# Altium PCB SHIELD_W5500.PcbDoc
Units mil, origin at the board's own origin, x right, y up, seen from the top; angles counter-clockwise.
Board outline 2700 x 2100 mil, 2 copper layers (Top Layer, Bottom Layer); 88 components, 60 nets, 292 pads, 76 vias.
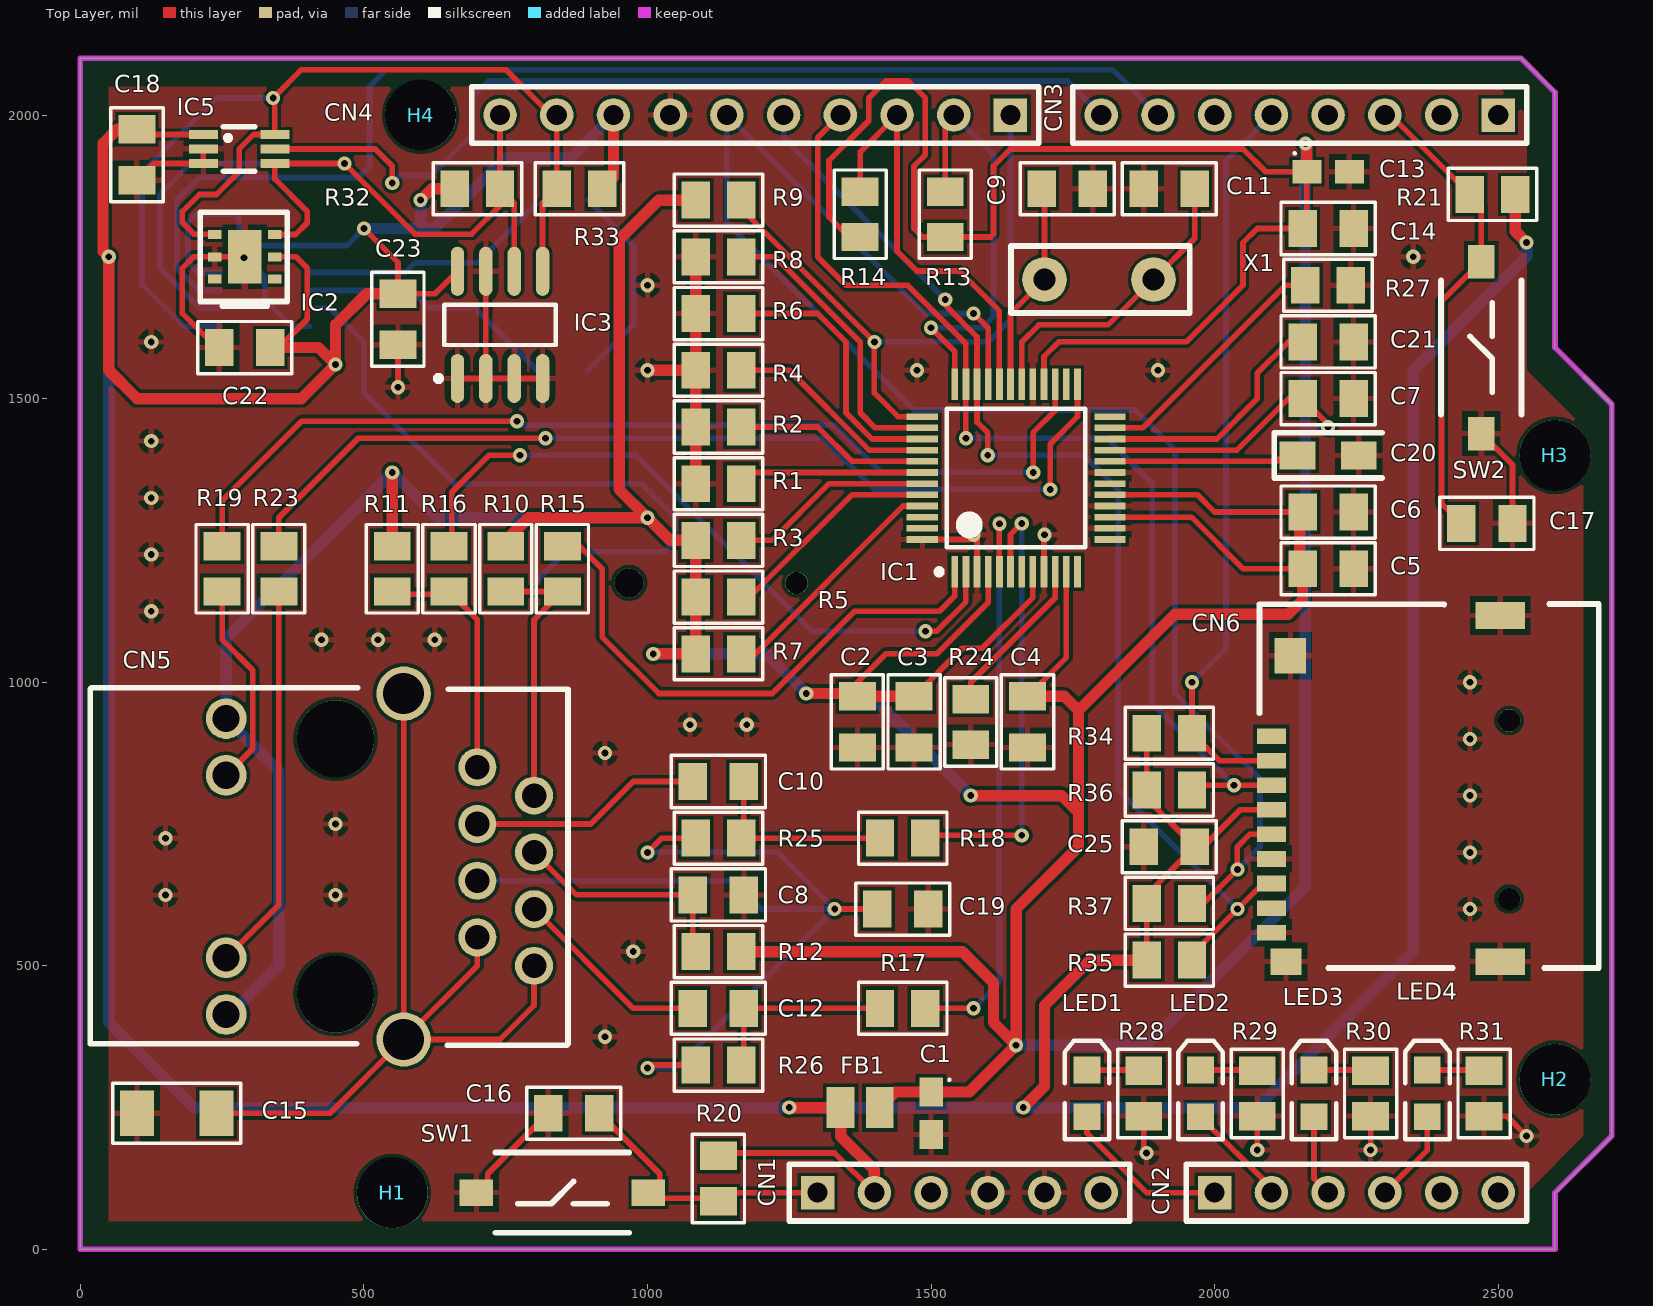
[diagram p0: Top Layer view]
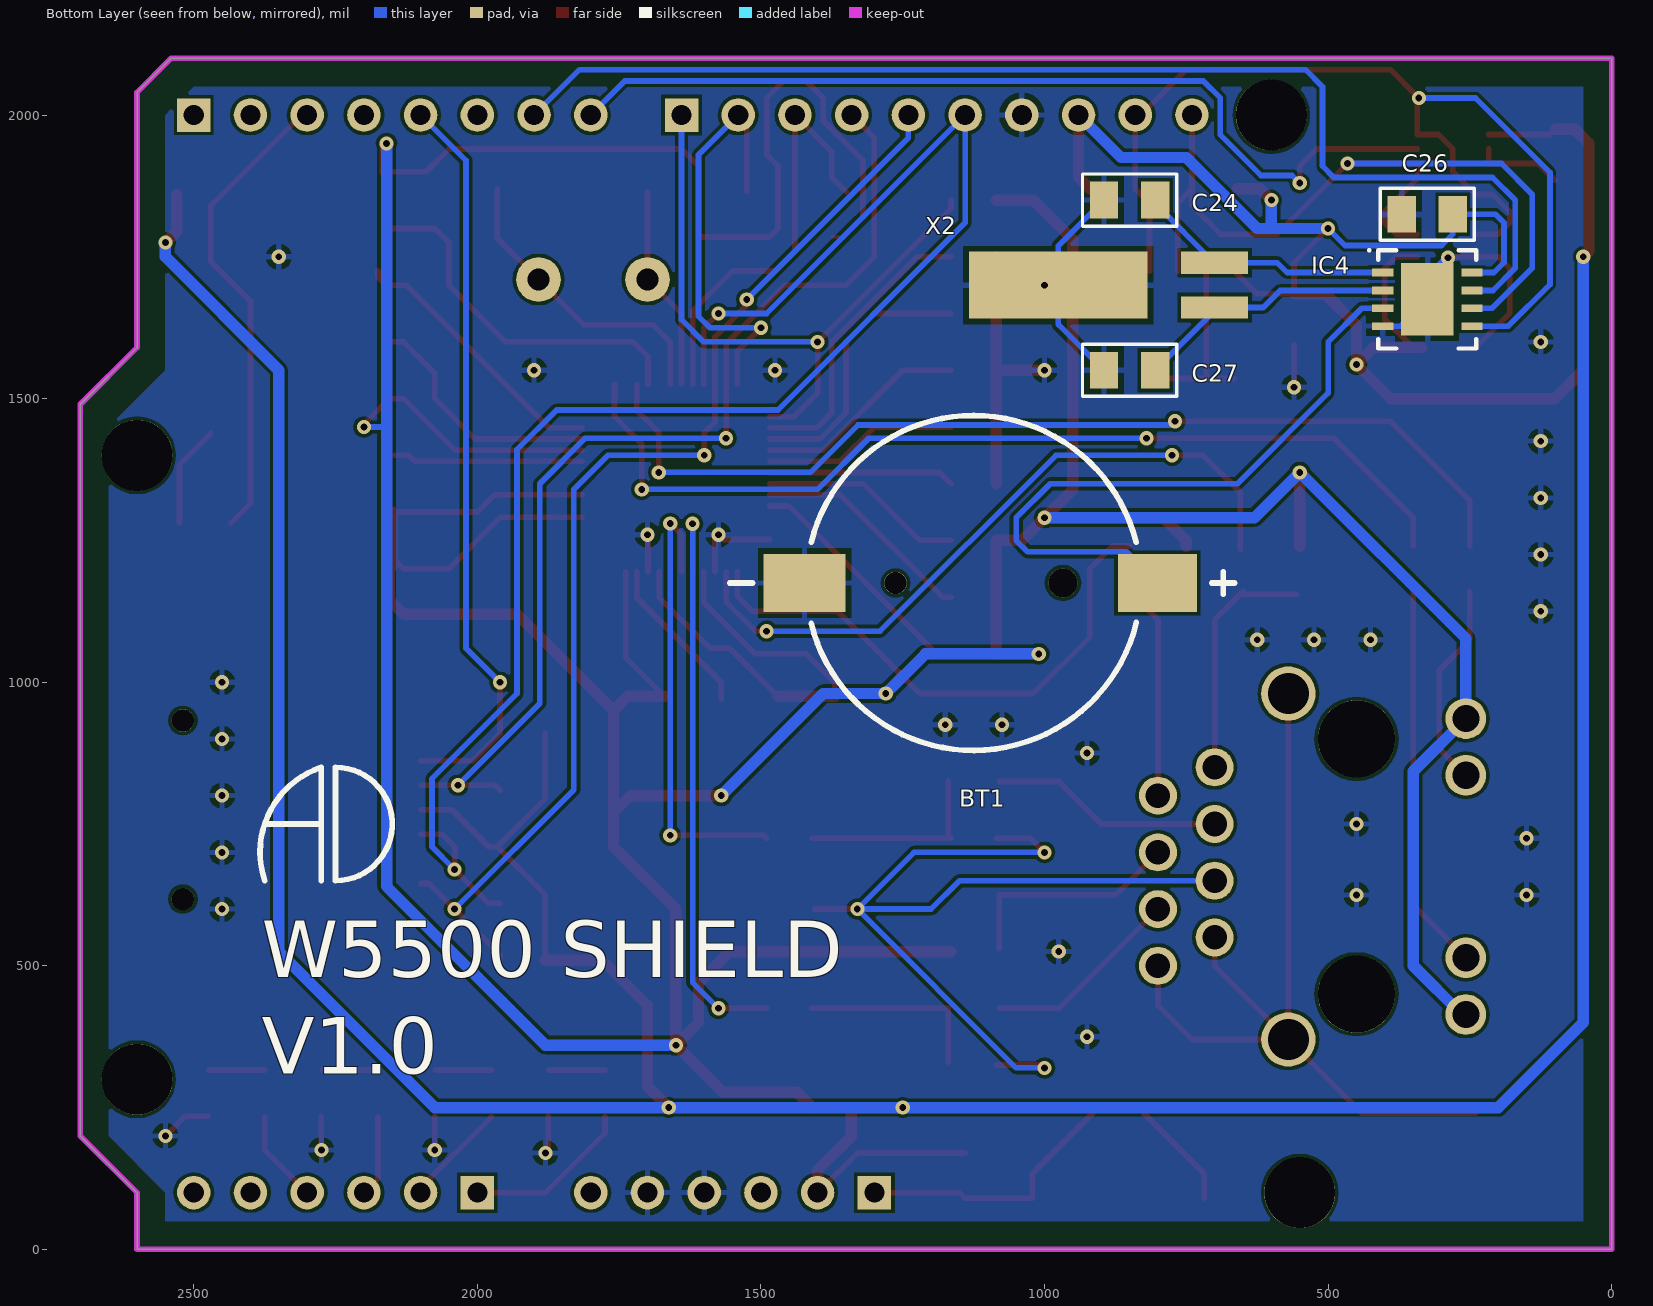
[diagram p1: Bottom Layer view, seen from below]

## Layer stack, top to bottom
Top Solder: solder mask 0.4, Solder Resist, Dk 3.5
Top Layer: signal copper 1.4
Dielectric 1: dielectric 12.6, FR-4, Dk 4.8
Bottom Layer: signal copper 1.4
Bottom Solder: solder mask 0.4, Solder Resist, Dk 3.5

## Board outline
0,0 0,2100 2540,2100 2600,2040 2600,1590 2700,1490 2700,200 2600,100 2600,0

## Design rules (kind name [scope] priority, off if disabled: settings)
AssemblyTestPointUsage SilkToBoardRegionClearance_1 [All] p2:
AssemblyTestPointUsage SilkToBoardRegionClearance_2 [All] p3:
Clearance [All] p1: gap=6
HoleSize [All] p1: absolutevalues=TRUE maxlimit=250 minlimit=11.81 maxpercent=80.000 minpercent=20.000
MatchedLengths DiffPair_DIFF100MatchedLengths [InDifferentialPairClass('DIFF100')] p1: tolerance=6 checknetsindiffpair=TRUE checkdiffpairvsdiffpair=FALSE checkxsignals=FALSE checkothers=FALSE
MinimumSolderMaskSliver [All] p1: minsoldermaskwidth=3.94
MinimumSolderMaskSliver SilkscreenOverComponentPads_2 [All] p2: minsoldermaskwidth=10
MinimumSolderMaskSliver SilkToSolderMaskClearance_1 [IsPad] p3: minsoldermaskwidth=10
MinimumSolderMaskSliver SilkscreenOverComponentPads_1 [All] p4: minsoldermaskwidth=10
MinimumSolderMaskSliver SilkToSolderMaskClearance [IsPad] p5: minsoldermaskwidth=10
MinimumSolderMaskSliver SilkscreenOverComponentPads [All] p6: minsoldermaskwidth=10
PolygonConnect [All] p1: connectstyle=Relief reliefconductorwidth=10 reliefentries=4 polygonreliefangle="90 Angle" airgapwidth=10
RoutingVias [All] p1: holewidth=12 width=25 viastyle="Through Hole" minholewidth=12 minwidth=25 maxholewidth=28 maxwidth=50
SilkToSolderMaskClearance SilkToSolderMaskClearance_2 [IsPad] p1: minsilkscreentomaskgap=10 clearancetoexposedcopper=TRUE
SolderMaskExpansion [All] p1: expansion=4
Width [All] p1: maxlimit=20 minlimit=6 preferedwidth=10 minimp=50.000000 maximp=50.000000 favimp=50.000000
27 further rules are at their usual default settings.

## Components (designator, comment, footprint, x,y, rotation, side; value= is the part's Value field where it differs from the comment)
BT1 "BATTERY" MPD_BC501SM 1125,1175 r180 bottom
C1 "CAP_P" CAPMP2013X12N_EIA-0805_CASE-R 1500,240 r270 top
C2 "CAP_NP" CAPC2012X100N_EIA0805 1370,930 r90 top
C3 "CAP_NP" CAPC2012X100N_EIA0805 1470,930 r90 top
C4 "CAP_NP" CAPC2012X100N_EIA0805 1670,930 r90 top
C5 "CAP_NP" CAPC2012X100N_EIA0805 2200,1200 r180 top
C6 "CAP_NP" CAPC2012X100N_EIA0805 2200,1300 r180 top
C7 "CAP_NP" CAPC2012X100N_EIA0805 2200,1500 r180 top
C8 "CAP_NP" CAPC2012X100N_EIA0805 1125,625 r0 top
C9 "CAP_NP" CAPC2012X100N_EIA0805 1740,1870 r0 top
C10 "CAP_NP" CAPC2012X100N_EIA0805 1125,825 r0 top
C11 "CAP_NP" CAPC2012X100N_EIA0805 1920,1870 r180 top
C12 "CAP_NP" CAPC2012X100N_EIA0805 1125,425 r0 top
C13 "CAP_P" CAPMP2013X12N_EIA-0805_CASE-R 2200,1900 r0 top
C14 "CAP_NP" CAPC2012X100N_EIA0805 2200,1800 r180 top
C15 "CAP_NP" CAPC3216X125N_EIA1206 170,240 r180 top
C16 "CAP_NP" CAPC2012X100N_EIA0805 870,240 r0 top
C17 "CAP_NP" CAPC2012X100N_EIA0805 2480,1280 r180 top
C18 "CAP_NP" CAPC2012X100N_EIA0805 100,1930 r270 top
C19 "CAP_NP" CAPC2012X100N_EIA0805 1450,600 r180 top
C20 "CAP_P" CAPMP3216X16N_EIA-1206_CASE-A 2200,1400 r0 top
C21 "CAP_NP" CAPC2012X100N_EIA0805 2200,1600 r180 top
C22 "CAP_NP" CAPC2012X100N_EIA0805 290,1590 r0 top
C23 "CAP_NP" CAPC2012X100N_EIA0805 560,1640 r90 top
C24 "CAP_NP" CAPC2012X100N_EIA0805 850,1850 r180 bottom
C25 "CAP_NP" CAPC2012X100N_EIA0805 1920,710 r0 top
C26 "CAP_NP" CAPC2012X100N_EIA0805 325,1825 r180 bottom
C27 "CAP_NP" CAPC2012X100N_EIA0805 850,1550 r180 bottom
CN1 "HDR_1X6" HDRFV6W70P254_1X6_1524X254X1118P 1300,100 r0 top locked
CN2 "HDR_1X6" HDRFV6W70P254_1X6_1524X254X1118P 2000,100 r0 top locked (schematic designator CN3)
CN3 "HDR_1X8" HDRFV8W70P254_1X8_2032X254X1118P 2500,2000 r180 top locked (schematic designator CN4)
CN4 "HDR_1X10" HDRFV10W70P254_1X10_2540X254X1118P 1640,2000 r180 top locked (schematic designator CN2)
CN5 "HR911105A" HANRUN_HR911105A 450,675 r90 top locked
CN6 "MICRO-SD" MICRO-SD-SELF-EJECT 2100,775 r180 top locked
FB1 "BEAD" FILC2012X100N_EIA0805 1375,250 r180 top
H1 "HOLES" HOLE_125MIL 550,100 r0 top locked
H2 "HOLES" HOLE_125MIL 2600,300 r0 top locked
H3 "HOLES" HOLE_125MIL 2600,1400 r0 top locked
H4 "HOLES" HOLE_125MIL 600,2000 r0 top locked
IC1 "W5500" QFP50P900X900X160-48N 1650,1360 r90 top
IC2 "SHT21" SHT21 290,1750 r180 top
IC3 "AT24C128" SOIC127P600X175-8N 740,1630 r90 top
IC4 "PCF8523TK/1,118" SON80P400X100_HS-9N_[NXP]SOT909-1 325,1675 r180 bottom
IC5 "TSL256x" DFN-6 280,1940 r0 top
LED1 "LED" LEDC2012X70N_EIA0805_RED 1775,275 r270 top
LED2 "LED" LEDC2012X70N_EIA0805_RED 1975,275 r270 top
LED3 "LED" LEDC2012X70N_EIA0805_RED 2175,275 r270 top
LED4 "LED" LEDC2012X70N_EIA0805_RED 2375,275 r270 top
R1 "RES" RESC2013X65N_EIA0805 1125,1350 r180 top
R2 "RES" RESC2013X65N_EIA0805 1125,1450 r180 top
R3 "RES" RESC2013X65N_EIA0805 1125,1250 r180 top
R4 "RES" RESC2013X65N_EIA0805 1125,1550 r180 top
R5 "RES" RESC2013X65N_EIA0805 1125,1150 r180 top
R6 "RES" RESC2013X65N_EIA0805 1125,1650 r180 top
R7 "RES" RESC2013X65N_EIA0805 1125,1050 r180 top
R8 "RES" RESC2013X65N_EIA0805 1125,1750 r180 top
R9 "RES" RESC2013X65N_EIA0805 1125,1850 r180 top
R10 "RES" RESC2013X65N_EIA0805 750,1200 r270 top
R11 "RES" RESC2013X65N_EIA0805 550,1200 r270 top
R12 "RES" RESC2013X65N_EIA0805 1125,525 r180 top
R13 "RES" RESC2013X65N_EIA0805 1525,1825 r90 top
R14 "RES" RESC2013X65N_EIA0805 1375,1825 r90 top
R15 "RES" RESC2013X65N_EIA0805 850,1200 r270 top
R16 "RES" RESC2013X65N_EIA0805 650,1200 r270 top
R17 "RES" RESC2013X65N_EIA0805 1450,425 r180 top
R18 "RES" RESC2013X65N_EIA0805 1450,725 r180 top
R19 "RES" RESC2013X65N_EIA0805 250,1200 r270 top
R20 "RES" RESC2013X65N_EIA0805 1125,125 r270 top
R21 "RES" RESC2013X65N_EIA0805 2490,1860 r180 top
R23 "RES" RESC2013X65N_EIA0805 350,1200 r270 top
R24 "RES" RESC2013X65N_EIA0805 1570,930 r270 top
R25 "RES" RESC2013X65N_EIA0805 1125,725 r180 top
R26 "RES" RESC2013X65N_EIA0805 1125,325 r180 top
R27 "RES" RESC2013X65N_EIA0805 2200,1700 r0 top
R28 "RES" RESC2013X65N_EIA0805 1875,275 r270 top
R29 "RES" RESC2013X65N_EIA0805 2075,275 r90 top
R30 "RES" RESC2013X65N_EIA0805 2275,275 r90 top
R31 "RES" RESC2013X65N_EIA0805 2475,275 r90 top
R32 "RES" RESC2013X65N_EIA0805 700,1870 r0 top
R33 "RES" RESC2013X65N_EIA0805 880,1870 r180 top
R34 "RES" RESC2013X65N_EIA0805 1920,910 r0 top
R35 "RES" RESC2013X65N_EIA0805 1920,510 r0 top
R36 "RES" RESC2013X65N_EIA0805 1920,810 r0 top
R37 "RES" RESC2013X65N_EIA0805 1920,610 r0 top
SW1 "SWITCH_TACTILE_2PIN" C&K_RS-282G05A3-SM_RT 850,100 r0 top
SW2 "SWITCH_TACTILE_2PIN" C&K_RS-282G05A3-SM_RT 2470,1590 r90 top
X1 "CRYSTAL" HC-49/US 1700,1710 r0 top
X2 "CRYSTAL_32K" 32.768_DIP 700,1700 r90 bottom

## Footprints (in the part's own frame and the unit in brackets; to place one, negate y for a bottom-side part, rotate by r counter-clockwise, add the part's x,y. Pads: shape width x height; smd on the part's side, far side on the other; paste and mask are expansions set on the pad)
32.768_DIP [mm]
  rect 1x3 smd: 1(-1,0) 2(1,0)
  rect 3x8 smd: 3(0,7)
  body extent -1.5,-0.01 1.5,11.01, height 3
C&K_RS-282G05A3-SM_RT [mm]
  rect 1.5x1.2 smd: 1(-3.85,0) 2(3.85,0)
  silkscreen extent -3,-1.8 3,1.8, body extent -4,-1.75 4,1.75, height 5
CAPC2012X100N_EIA0805 [mil]
  rect 50x65 smd: 1(-45,0) 2(45,0)
  silkscreen extent -83,-46 83,46, body extent -39,-25 39,25, height 31
CAPC3216X125N_EIA1206 [mil]
  rect 60x80 smd: 1(-70,0) 2(70,0)
  silkscreen extent -113,-53 113,53, body extent -63,-31 63,32, height 39
CAPMP2013X12N_EIA-0805_CASE-R [mm] "Molded Capacitor, 2-Leads, Body 2.05x1.30mm, IPC Medium Density"
  rect 1.3x1.05 smd: 1(-0.95,0) 2(0.95,0)
  silkscreen extent -1.55,0.78 -1.45,0.87, body extent -1.12,-0.66 1.13,0.69, height 1.35
CAPMP3216X16N_EIA-1206_CASE-A [mm] "Molded Capacitor, 2-Leads, Body 3.20x1.60mm, IPC Medium Density"
  rect 1.6x1.25 smd: 1(-1.375,0) 2(1.375,0)
  silkscreen extent -2.41,-1.02 2.41,1.02, body extent -1.6,-0.8 1.6,0.8, height 1.6
DFN-6 [mm]
  rect 1.3x0.4 smd: 1(-1.6,0.65) 2(-1.6,0) 3(-1.6,-0.65) 4(1.6,-0.65) 5(1.6,0) 6(1.6,0.65)
  silkscreen extent -0.7,-1 0.7,1, body extent -1.05,-1 1.05,1, height 0.81
FILC2012X100N_EIA0805 [mm] "Chip Inductor, 2-Leads, Body 2.0x1.3mm, IPC Medium Density"
  rect 1.25x1.85 smd: 1(-0.875,0) 2(0.875,0)
  body extent -1,-0.62 1,0.63, height 0.85
HANRUN_HR911105A [mm]
  round 1.7 hole 1.1: 1(4.445,-6.35) 2(3.175,-8.89) 3(1.905,-6.35) 4(0.635,-8.89) 5(-0.635,-6.35) 6(-1.905,-8.89) 7(-3.175,-6.35) 8(-4.445,-8.89)
  round 1.82 hole 1.22: 9(6.625,4.9) 10(4.085,4.9) 11(-4.085,4.9) 12(-6.625,4.9)
  round 2.43 hole 1.83: 13(7.745,-3.05) 14(-7.745,-3.05)
  round 3.45 hole 3.45: ""(-5.715,0) ""(5.715,0)
  silkscreen extent -8,-10.41 8,10.99, body extent -7.94,-10.41 7.94,10.99, height 13.51
HC-49/US [mm]
  round 2 hole 1: 1(0,0) 2(4.88,0)
  silkscreen extent -1.5,-1.5 6.5,1.5, body extent -2.99,-2.24 7.99,2.25, height 3.6
HDRFV6W70P254_1X6_1524X254X1118P [mm]
  rect 1.5x1.5 hole 0.9: 1(0,0)
  round 1.5 hole 0.9: 2(2.54,0) 3(5.08,0) 4(7.62,0) 5(10.16,0) 6(12.7,0)
  silkscreen extent -1.27,-1.27 13.97,1.27, body extent -1.27,-1.27 13.97,1.27, height 6.02
HDRFV8W70P254_1X8_2032X254X1118P [mm]
  rect 1.5x1.5 hole 0.9: 1(0,0)
  round 1.5 hole 0.9: 2(2.54,0) 3(5.08,0) 4(7.62,0) 5(10.16,0) 6(12.7,0) 7(15.24,0) 8(17.78,0)
  silkscreen extent -1.27,-1.27 19.05,1.27, body extent -1.27,-1.27 19.05,1.27, height 6.02
HDRFV10W70P254_1X10_2540X254X1118P [mm]
  rect 1.5x1.5 hole 0.9: 1(0,0)
  round 1.5 hole 0.9: 2(2.54,0) 3(5.08,0) 4(7.62,0) 5(10.16,0) 6(12.7,0) 7(15.24,0) 8(17.78,0) 9(20.32,0) 10(22.86,0)
  silkscreen extent -1.27,-1.27 24.13,1.27, body extent -1.27,-1.27 24.13,1.27, height 6.02
HOLE_125MIL [mil]
  round 125 hole 125: ""(0,0)
LEDC2012X70N_EIA0805_RED [mm] "SM LED; 2 Flat Leads"
  rect 1.2x1.2 smd: 1(-1.05,0) 2(1.05,0)
  silkscreen extent -2.35,-1 2.05,1, body extent -1.01,-0.62 1.01,0.62, height 1.1
MICRO-SD-SELF-EJECT [mm]
  rect 1.3x0.7 smd: 1(0,-3.3) 2(0,-2.2) 3(0,-1.1) 4(0,0) 5(0,1.1) 6(0,2.2) 7(0,3.3) 8(0,4.4) 9(0,5.5)
  rect 2.2x1.2 smd: 10(-10.25,6.8) 10(-10.25,-8.7)
  rect 1.4x1.6 smd: 10(-0.85,-6.9)
  rect 1.4x1.2 smd: 10(-0.65,6.8)
  round 1 hole 1: ""(-10.65,-4) ""(-10.65,4)
  silkscreen extent -14.67,-9.22 0.53,7.09, body extent -14.67,-9.22 0.54,7.09, height 2.17
MPD_BC501SM [mm]
  rect 3.54x2.6 smd: 1(8.23,0)
  rect 3.66x2.6 smd: 2(-7.57,0)
  round 1 hole 1: ""(-3.5,0)
  round 1.3 hole 1.3: ""(4,0)
  silkscreen extent -10.92,-7.5 11.68,7.5, body extent -8.89,-7.37 9.91,7.38, height 4.26
QFP50P900X900X160-48N [mm] "TSQFP, 48-Leads, Body 7.00x7.00mm, Pitch 0.50mm, IPC Medium Density"
  rect 1.4x0.3 smd: 1(-4.2,2.75) 2(-4.2,2.25) 3(-4.2,1.75) 4(-4.2,1.25) 5(-4.2,0.75) 6(-4.2,0.25) 7(-4.2,-0.25) 8(-4.2,-0.75) 9(-4.2,-1.25) 10(-4.2,-1.75) 11(-4.2,-2.25) 12(-4.2,-2.75) 25(4.2,-2.75) 26(4.2,-2.25) 27(4.2,-1.75) 28(4.2,-1.25) 29(4.2,-0.75) 30(4.2,-0.25) 31(4.2,0.25) 32(4.2,0.75) 33(4.2,1.25) 34(4.2,1.75) 35(4.2,2.25) 36(4.2,2.75)
  rect 0.3x1.4 smd: 13(-2.75,-4.2) 14(-2.25,-4.2) 15(-1.75,-4.2) 16(-1.25,-4.2) 17(-0.75,-4.2) 18(-0.25,-4.2) 19(0.25,-4.2) 20(0.75,-4.2) 21(1.25,-4.2) 22(1.75,-4.2) 23(2.25,-4.2) 24(2.75,-4.2) 37(2.75,4.2) 38(2.25,4.2) 39(1.75,4.2) 40(1.25,4.2) 41(0.75,4.2) 42(0.25,4.2) 43(-0.25,4.2) 44(-0.75,4.2) 45(-1.25,4.2) 46(-1.75,4.2) 47(-2.25,4.2) 48(-2.75,4.2)
  silkscreen extent -4.32,-3.1 3.1,3.57, body extent -4.5,-4.5 4.5,4.5, height 1.6
RESC2013X65N_EIA0805 [mil]
  rect 50x65 smd: 1(-40,0) 2(40,0)
  silkscreen extent -78,-46 78,46, body extent -39,-25 39,25, height 31
SHT21 [mm]
  rect 0.6x0.4 smd: 1(1.35,-1) 2(1.35,0) 3(1.35,1) 4(-1.35,1) 5(-1.35,0) 6(-1.35,-1)
  rect 1.5x2.4 smd: 7(0,0)
  silkscreen extent -1.9,-2 2,2.2, body extent -1.51,-1.5 1.51,1.5, height 1.13
SOIC127P600X175-8N [mm] "SOIC, 8-Leads, Body 4,90x3,90mm, Pitch 1,27mm, IPC Medium Density"
  oval 2.2x0.6 smd: 1(-2.4,1.905) 2(-2.4,0.635) 3(-2.4,-0.635) 4(-2.4,-1.905) 5(2.4,-1.905) 6(2.4,-0.635) 7(2.4,0.635) 8(2.4,1.905)
  silkscreen extent -2.52,-2.5 0.9,2.88, body extent -3.03,-2.5 3.03,2.5, height 1.9
SON80P400X100_HS-9N_[NXP]SOT909-1 [mm] "SON, 8-Leads, Body 4.00x4.00mm, Pitch 0.80mm, Thermal Pad 3.10x2.18mm, IPC Medium Density"
  rect 0.95x0.35 smd: 1(-2,1.2) 2(-2,0.4) 3(-2,-0.4) 4(-2,-1.2) 5(2,-1.2) 6(2,-0.4) 7(2,0.4) 8(2,1.2)
  rect 2.35x3.25 smd paste-1.09: 9(0,0)
  silkscreen extent -2.65,-2.2 2.2,2.25, body extent -2.05,-2.05 2.05,2.05, height 1

## Part data
BT1: library part SBAT00011, "HOLDER COIN CELL FOR CR1220 SMD"
C1 C13: library part SCAP01400004, "CAP TANT 10UF 6.3V 10% 0805"
C2 C3 C4 C5 C6 C7 C14 C16 C17 C18 C22 C23 C25 C26: library part SCAP00300093, "CAP CER 0.1UF 25V X7R 0805"
C8: library part SCAP00300087, "CAP CER 0.022UF 50V X7R 0805"
C9 C11: library part SCAP00300040, "CAP CER 18PF 50V NP0 0805"
C10 C12: library part SCAP00300083, "CAP CER 6800PF 50V X7R 0805"
C15: library part SCAP00410036, "CAP CER 1000PF 2KV X7R 1206"
C19 C21: library part SCAP00300085, "CAP CER 10000PF 50V X7R 0805"
C20: library part SCAP01400003, "CAP TANT 4.7UF 16V 10% 1206"
C24 C27: library part SCAP00300030, "CAP CER 8PF 50V NP0 0805"
CN1 CN2: library part SCON00124, "CONN ARDUINO HEADER .0100\" 6POS"
CN3: library part SCON00125, "CONN ARDUINO HEADER .0100\" 8POS"
CN4: library part SCON00126, "CONN ARDUINO HEADER .0100\" 10POS"
CN5: library part SCON00127, "CONN MAGJACK 1PORT 100 BASE-T"
CN6: library part SCON00094, "CONN MICRO SD CARD PUSH-PUSH R/A"
FB1: library part SFIL00005, "FERRITE CHIP POWER 120 OHM SMD"
H1 H2 H3 H4: library part SMSC00005, "Holes"
IC1: library part SIC00138, "IC CTLR 3-1 ETH TCP/IP 48LQFP"
IC2: library part SSEN00014, "HUMIDITY AND TEMPERATURE SENSOR"
IC3: library part SMEM00014, "IC EEPROM 128KBIT 1MHZ 8SOIC"
IC4: library part SIC00133, "IC RTC CLK/CALENDAR I2C 8-HVSON"
IC5: library part SSEN00013, "IC LIGHT TO DGTL CONV 6-DFN"
LED1 LED2 LED3 LED4: library part SOPT00004, "LED SUPER RED CLR THIN 0805 SMD"
R1 R2 R3 R4 R5 R6 R7 R8 R9 R13 R14 R20 R21 R27 R32 R33 R34 R35 R36 R37: library part SRES03010098, "RES SMD 10K OHM 1% 1/8W 0805"
R10 R11 R25 R26: library part SRES03030081, "RES SMD 49.9 OHM 1% 1/8W 0805"
R12: library part SRES03010026, "RES SMD 10 OHM 1% 1/8W 0805"
R15 R16 R17 R18: library part SRES03010038, "RES SMD 33 OHM 1% 1/8W 0805"
R19 R23 R28 R29 R30 R31: library part SRES03010062, "RES SMD 330 OHM 1% 1/8W 0805"
R24: library part SRES03010171, "RES SMD 12.4K OHM 1% 1/8W 0805"
SW1 SW2: library part SSWI00022, "SWITCH TACTILE SPST-NO 0.05A 12V"
X1: library part SCRY00016, "CRYSTAL 25.0000MHZ 18PF T/H"
X2: library part SCRY00009, "CRYSTAL 32.768KHZ 6PF THRU"

## Via types
v1: diameter 25, hole 12, Top Layer to Bottom Layer, 76 vias

## Nets (pads, with @x,y where several pads share a name; then routed paths per layer and width w, separated by ;. In a path a pad name is that pad's centre, name@x,y a point inside that pad or via, vN(x,y) a via of type N, cw(c..) or ccw(c..) an arc to the next point about the centre after c; other vN are vias at no path point)
3V3: C18.1 C22.2 C23.2 C25.2 C26.2 CN1.2 CN4.8 CN6.4 FB1.2 IC2.5 IC3.8 IC4.8 IC5.1 R20.1 R21.1 R32.1 R33.1 R34.1 R35.1 R36.1 R37.1 | length 9990.5
  Top Layer w10: C18.1 109.41,1965.59 IC5.1 ; IC2.5 380,1750 400,1730 400,1640 C22.2@350,1590 ; v1(500,1800) 560,1740 C23.2 625.51,1685 IC3.8 ; R20.1@1140,170 1330,170 CN1.2 ; R35.1 R37.1 1880,625 C25.2 ; R34.1 R36.1 1880,795 C25.2 ; CN6.4 2045,775 1980,710 C25.2
  Top Layer w20: C18.1 65,1975 40,1950 40,1760 v1(50,1750) 50,1550 100,1500 390,1500 v1(450,1560) ; C22.2 350,1590 420,1590 v1(450,1560) ; C23.2 505,1685 450,1630 v1(450,1560) ; v1(600,1850) 620,1870 R32.1 ; R33.1 940,1890 CN4.8 ; v1(1250,250) FB1.2 1340.55,199.45 1400,140 CN1.2 ; v1(1662.5,250) 1700,287.5 1700,430 1780,510 R35.1 ; R21.1 2530,1795 v1(2550,1775)
  Bottom Layer w10: IC4.8 207.76,1722.24 190,1740 190,1810 205,1825 C26.2 280,1790 300,1770 470,1770 v1(500,1800)
  Bottom Layer w20: v1(50,1750) 50,400 200,250 v1(1250,250) v1(1662.5,250) 2075,250 2350,525 2350,1550 2550,1750 v1(2550,1775) ; v1(500,1800) 600,1800 ; v1(600,1850) 600,1800 ; CN4.8 865,1925 750,1925 625,1800 600,1800
3V3_W5500: C1.1 C2.2 C3.2 C4.2 C5.2 C6.2 C7.2 C13.1 C14.2 CN5.9 CN5.12 FB1.1 IC1.4 IC1.8 IC1.11 IC1.15 IC1.17 IC1.21 IC1.28 R3.2 R5.2 R7.2 R9.2 R10.1 R11.1 R12.1 R13.1 R14.1 | length 12807.1
  Top Layer w6: R14.1@1355,1785 R14.1
  Top Layer w10: R14.1@1355,1785 1320,1820 1320,1920 1390,1990 1390,2030 1420,2060 1460,2060 1490,2030 1490,1930 1470,1910 1470,1800 1485,1785 R13.1 1605,1785 1610,1790 1610,1910 1640,1940 2050,1940 2090,1900 C13.1 2162.6,1807.6 C14.2 2075,1800 2050,1775 2050,1700 1950,1600 1725,1600 1699.21,1574.21 IC1.28 ; C2.2 1370,1000 1420,1050 1510,1050 1600.79,1140.79 IC1.4 ; C3.2 1555,1060 1590,1060 1679.53,1149.53 IC1.8 ; C4.2 1738.58,1043.58 IC1.11 ; IC1.15 1958.9,1291.1 2050,1200 2130,1200 C5.2@2150,1220 ; IC1.17 1969.53,1330.47 2000,1300 C6.2@2150,1300 ; IC1.21 2039.21,1409.21 2130,1500 C7.2 2200,1455 v1(2200,1450)
  Top Layer w20: R11.1 v1(550,1370) ; R10.1 750,1250 790,1290 v1(1000,1290) ; v1(1010,1050) R7.2 R5.2 R3.2 1040,1250 v1(1000,1290) ; R9.2 1020,1850 950,1780 950,1340 v1(1000,1290) ; R12.1 1555,525 1610,470 1610,400 v1(1650,360) ; v1(1280,980) 1365,980 C2.2 C3.2 ; FB1.1 1436.85,277.4 C1.1 1567.4,277.4 v1(1650,360) ; v1(1570,800) 1730,800 1760,770 ; C4.2 1735,975 1760,950 ; C6.2@2150,1300 2150,1220 2150,1205 C5.2 2155,1145 2130,1120 1930,1120 1760,950 ; v1(2160,1950) 2162.6,1947.4 C13.1 ; v1(1650,360) 1650,600 1760,710 1760,770 ; 1760,770 1760,950
  Bottom Layer w10: 2170,1450 v1(2200,1450)
  Bottom Layer w20: CN5.12 264.17,414.17 350,500 350,842.91 CN5.9 257.09,1077.09 v1(550,1370) 630,1290 v1(1000,1290) ; v1(1010,1050) 1210,1050 v1(1280,980) 1390,980 v1(1570,800) ; v1(1650,360) 1880,360 2160,640 v1(2160,1950)
5V: CN1.3
GND: BT1.2 C1.2 C2.1 C3.1 C4.1 C5.1 C6.1 C7.1 C8.2 C9.2 C11.2 C13.2 C14.1 C15.2 C16.1 C17.1 C18.2 C19.1 C20.2 C21.1 C22.1 C23.1 C24.1 C25.1 C26.1 C27.1 CN1.4 CN1.5 CN4.7 CN6.6 CN6.9 CN6.10 IC1.3 IC1.9 IC1.14 IC1.16 IC1.19 IC1.29 IC1.48 IC2.2 IC2.7 IC3.1 IC3.2 IC3.3 IC3.4 IC3.7 IC4.4 IC4.9 IC5.2 IC5.3 R1.2 R2.2 R4.2 R6.2 R8.2 R24.2 R27.2 R28.2 R29.1 R30.1 R31.1 SW1.1 SW2.1 X2.3 | length 2775.1
  Top Layer w10: C18.2 129.41,1914.41 IC5.3 IC5.2 ; C22.1 240,1590 180,1650 180,1730 200,1750 IC2.2 IC2.7@288.38,1750 ; v1(560,1520) C23.1 ; IC3.1 IC3.2 ; IC3.7 IC3.2 ; SW1.1@718.43,90 718.43,133.43 C16.1 ; IC3.4 IC3.3 IC3.2 ; IC1.48 1566.73,1251.73 v1(1575,1260) 1581.1,1253.9 IC1.3 ; IC1.9 1699.21,1259.21 v1(1700,1260) ; R28.2 1875,175 v1(1880,170) ; v1(2075,175) R29.1 ; v1(2275,175) R30.1 ; SW2.1 2525,1383.43 C17.1 ; R31.1 2515,235 v1(2550,200)
  Top Layer w20: v1(1000,1550) R4.2 ; R1.2 R2.2 R4.2 ; R8.2 R6.2 R4.2
  Bottom Layer w10: v1(288.38,1748.38) 291.62,1748.38 325,1715 IC4.9 372.24,1627.76 IC4.4 ; C27.1 975.59,1630.59 X2.3 975.59,1769.41 C24.1
  other v1: 925,375 975,525 2450,600 150,625 450,625 2450,700 150,725 450,750 2450,800 925,875 2450,900 1075,925 1175,925 2450,1000 425,1075 525,1075 625,1075 125,1125 125,1225 125,1325 125,1425 1475,1550 1900,1550 125,1600 1000,1700 2350,1750
I2C_SCL: CN4.10 IC2.6 IC3.6 IC4.6 IC5.4 R32.2 | length 1592.2
  Top Layer w10: IC2.6 379.37,1789.37 400,1810 400,1830 342.99,1887.01 IC5.4 v1(465.59,1914.41) 590,1790 690,1790 740,1840 R32.2 ; CN4.10 R32.2 ; IC3.6 765,1845 R32.2
  Bottom Layer w10: IC4.6 210.75,1659.25 140,1730 140,1860 194.41,1914.41 v1(465.59,1914.41)
I2C_SDA: CN4.9 IC2.1 IC3.5 IC4.5 IC5.6 R33.2 | length 1881.9
  Top Layer w10: IC2.1 236.22,1790 200,1790 180,1810 180,1830 210,1860 240,1860 280,1900 280,1940 305.59,1965.59 IC5.6 342.99,2032.99 390,2080 750,2080 830,2000 CN4.9 R33.2 815,1845 IC3.5
  Bottom Layer w10: IC4.5 182.24,1627.76 108.78,1701.22 108.78,1898.78 240,2030 v1(340,2030)
LED1: CN2.1 LED1.2 | length 297.2
  Top Layer w10: LED1.2 1774.99,205.01 1880,100 CN2.1
LED2: CN2.2 LED2.2 | length 185.5
  Top Layer w10: LED2.2 2100,108.66 CN2.2
LED3: CN2.3 LED3.2 | length 144
  Top Layer w10: LED3.2 2174.99,125.01 CN2.3
LED4: CN2.4 LED4.2 | length 164.7
  Top Layer w10: CN2.4 2374.99,174.99 LED4.2
LIGHT_INT: CN3.8 IC5.5 | length 1636.9
  Top Layer w10: IC5.5 520,1940 550,1910 v1(550,1880)
  Bottom Layer w10: v1(550,1880) 563.5,1893.5 618.5,1893.5 690,1965 690,2030 720,2060 1740,2060 CN3.8
MICROSD_CS: CN3.5 CN6.2 R34.2 | length 1308
  Top Layer w10: v1(1960,1000) R34.2 2008.39,861.61 CN6.2
  Bottom Layer w10: v1(1960,1000) 2020,1060 2020,1920 CN3.5
NetBT1_1: BT1.1 IC4.3 | length 1172
  Bottom Layer w10: IC4.3 440.75,1659.25 500,1600 500,1510 660,1350 990,1350 1050,1290 1050,1250 1030,1230 855.98,1230 BT1.1
NetC8_1: C8.1 CN5.4 R12.2 | length 406.1
  Top Layer w10: CN5.4 875,625 C8.1 R12.2@1080,530
NetC9_1: C9.1 IC1.31 X1.1 | length 364.4
  Top Layer w10: IC1.31 1640.16,1650.16 X1.1 C9.1@1700,1865
NetC10_1: C10.1 CN5.3 | length 411.1
  Top Layer w10: CN5.3 900,750 975,825 C10.1
NetC11_1: C11.1 IC1.30 X1.2 | length 542.6
  Top Layer w10: IC1.30 1659.84,1599.84 1690,1630 1812.13,1630 X1.2 1965,1782.87 C11.1
NetC12_1: C12.1 CN5.6 | length 352.5
  Top Layer w10: CN5.6 975,425 C12.1
NetC15_1: C15.1 CN5.7 CN5.8 CN5.13 CN5.14 | length 1552.3
  Top Layer w10: C15.1 440,240 CN5.14 ; CN5.13 CN5.14 ; CN5.7 700,500 CN5.14 ; CN5.8 800,430 740.08,370.08 CN5.14
NetC19_2: C19.2 CN5.5 R25.2 R26.2 | length 1725.5
  Top Layer w10: v1(1000,320) 1005,325 R26.2 ; v1(1000,700) 1025,725 R25.2 ; v1(1330,600) C19.2
  Bottom Layer w10: CN5.5 1150,650 1200,600 v1(1330,600) ; v1(1000,320) 1050,320 v1(1330,600) ; v1(1000,700) 1230,700 v1(1330,600)
NetC20_1: C20.1 IC1.20 | length 334.8
  Top Layer w10: IC1.20 2110.39,1389.53 2120.87,1400 C20.1
NetC21_2: C21.2 IC1.22 | length 431.9
  Top Layer w10: IC1.22 2003.9,1428.9 2075,1500 2075,1545 2130,1600 C21.2@2150,1600
NetC24_2: C24.2 IC4.1 X2.2 | length 451.8
  Bottom Layer w10: IC4.1 572.24,1722.24 589.37,1739.37 X2.2 C24.2@805,1844.37
NetC27_2: C27.2 IC4.2 X2.1 | length 462.9
  Bottom Layer w10: IC4.2 584.25,1690.75 614.37,1660.63 X2.1 700,1655 C27.2
NetCN5_10: CN5.10 R19.2 | length 365.9
  Top Layer w10: R19.2 250,1075 303.91,1021.09 303.91,882.65 CN5.10
NetCN5_11: CN5.11 R23.2 | length 684.3
  Top Layer w10: CN5.11 350,607.09 R23.2
NetIC1_1: IC1.1 R15.1 | length 983.8
  Top Layer w10: R15.1 880,1240 920,1200 920,1080 1020,980 1220,980 1365,1125 1515,1125 1541.73,1151.73 IC1.1
NetIC1_2: IC1.2 R16.1 | length 1236.3
  Top Layer w10: R16.1@655,1235 655,1335 720,1400 v1(775,1400) ; v1(1490,1090) 1510,1090 1561.42,1141.42 IC1.2
  Bottom Layer w10: v1(775,1400) 980,1400 1290,1090 v1(1490,1090)
NetIC1_5: IC1.5 R17.1 | length 1043.2
  Top Layer w10: R17.1 v1(1575,425) ; IC1.5 v1(1620.47,1279.53)
  Bottom Layer w10: v1(1575,425) 1620.47,470.47 v1(1620.47,1279.53)
NetIC1_6: IC1.6 R18.1 | length 815.6
  Top Layer w10: R18.1 1495,730 v1(1660,730) ; IC1.6 1640.16,1260.16 v1(1660,1280)
  Bottom Layer w10: v1(1660,730) v1(1660,1280)
NetIC1_10: IC1.10 R24.1 | length 286.3
  Top Layer w10: R24.1 1570,1000 1718.9,1148.9 IC1.10
NetIC1_23: IC1.23 R27.1 | length 480
  Top Layer w10: IC1.23 1873.58,1448.58 2125,1700 R27.1 2175,1715 R27.1@2175,1725
NetIC1_38: IC1.38 R8.1 | length 517.7
  Top Layer w10: R8.1 1225,1750 1375,1600 1375,1475 1401.42,1448.58 IC1.38
NetIC1_39: IC1.39 R6.1 | length 484.5
  Top Layer w10: R6.1 1300,1650 1350,1600 1350,1475 1396.1,1428.9 IC1.39
NetIC1_40: IC1.40 R4.1 | length 378
  Top Layer w10: R4.1 1250,1550 1390.79,1409.21 IC1.40
NetIC1_41: IC1.41 R2.1 | length 344.7
  Top Layer w10: R2.1 1300,1450 1360.47,1389.53 IC1.41
NetIC1_42: IC1.42 R1.1 | length 327.9
  Top Layer w10: R1.1 1184.84,1369.84 IC1.42
NetIC1_43: IC1.43 R3.1 | length 361.1
  Top Layer w10: R3.1 1220,1250 1320.16,1350.16 IC1.43
NetIC1_44: IC1.44 R5.1 | length 394.4
  Top Layer w10: R5.1 1180,1150 1360.47,1330.47 IC1.44
NetIC1_45: IC1.45 R7.1 | length 427.7
  Top Layer w10: R7.1 1190,1050 1450.79,1310.79 IC1.45
NetLED1_1: LED1.1 R28.1 | length 98.7
  Top Layer w10: LED1.1 R28.1@1873.65,316.35
NetLED2_1: LED2.1 R29.2 | length 98.7
  Top Layer w10: LED2.1 R29.2@2073.65,316.35
NetLED3_1: LED3.1 R30.2 | length 98.7
  Top Layer w10: LED3.1 R30.2@2273.65,316.35
NetLED4_1: LED4.1 R31.2 | length 98.7
  Top Layer w10: LED4.1 R31.2@2473.65,316.35
R\E\S\E\T\: C16.2 CN1.1 R20.2 SW1.2 | length 476.7
  Top Layer w10: C16.2 1021.57,133.43 1021.57,90 1140,90 1150,100 CN1.1
RTC_INT: CN3.7 IC4.7 | length 2152.9
  Bottom Layer w10: IC4.7 209.25,1690.75 170,1730 170,1850 210,1890 490,1890 510,1910 510,2050 540,2080 1820,2080 CN3.7
RXN: C12.2 R17.2 R26.1 | length 335
  Top Layer w10: R26.1@1170,330 C12.2 R17.2
RXP: C10.2 R18.2 R25.1 | length 347.1
  Top Layer w10: C10.2 1170,730 R25.1 R18.2
SPI_MISO: CN4.5 CN6.7 IC1.34 R35.2 | length 2032.8
  Top Layer w10: v1(1525,1675) 1525,1665 1581.1,1608.9 IC1.34 1581.1,1458.9 1600,1440 v1(1600,1400) ; R35.2 1960,520 v1(2040,600) 2085.08,645.08 CN6.7
  Bottom Layer w10: CN4.5 1240,1960 v1(1525,1675) ; v1(1600,1400) 1770,1400 1830,1340 1830,810 v1(2040,600)
SPI_MOSI: CN4.4 CN6.3 IC1.35 R36.2 | length 1854.8
  Top Layer w10: CN4.4 1300,1960 1300,1750 1350,1700 1458.23,1700 1561.42,1596.82 IC1.35 v1(1561.42,1430) ; R36.2 1968.31,818.31 v1(2034.15,818.31) CN6.3
  Bottom Layer w10: v1(1561.42,1430) 1810,1430 1890,1350 1890,962.46 v1(2034.15,818.31)
SPI_SCK: CN4.6 CN6.5 IC1.33 R37.2 | length 2893.5
  Top Layer w10: v1(1575,1650) 1600.79,1624.21 IC1.33 ; R37.2 1980,610 v1(2040,670) 2040,710 2061.69,731.69 CN6.5
  Bottom Layer w10: v1(1575,1650) 1490,1650 CN4.6 1140,1810 1470,1480 1860,1480 1930,1410 1930,980 2080,830 2080,710 v1(2040,670)
TXN: CN5.2 R10.2 R15.2 | length 480.7
  Top Layer w10: R10.2 R15.2 800,1110 CN5.2
TXP: CN5.1 R11.2 R16.2 | length 430.7
  Top Layer w10: R11.2@555,1155 R16.2@655,1155 ; R16.2 R16.2@655,1155 ; CN5.1 700,1110 R16.2@655,1155
USER_BUTTON: C17.2 CN3.3 R21.2 SW2.2 | length 839.8
  Top Layer w10: CN3.3 2310,2000 R21.2 2470,1840 SW2.2 2400,1671.57 2400,1315 C17.2
VIN: CN1.6
W5500_ACTLED: IC1.27 R19.1 | length 1776.7
  Top Layer w10: R19.1 250,1320 390,1460 v1(770,1460) ; v1(1680,1370) 1680,1440 1718.9,1478.9 IC1.27
  Bottom Layer w10: v1(770,1460) 776.5,1453.5 1329.13,1453.5 1412.63,1370 v1(1680,1370)
W5500_CS: CN4.3 IC1.32 R14.2 | length 765.6
  Top Layer w10: R14.2@1350,1865 1375,1890 1375,1935 CN4.3 1440,1760 1475,1725 1550,1725 1620.47,1654.53 IC1.32
W5500_INTN: CN4.2 IC1.36 R13.2 | length 739.2
  Top Layer w10: v1(1500,1625) 1541.73,1583.27 IC1.36 ; R13.2 CN4.2@1525,1985
  Bottom Layer w10: v1(1500,1625) 1590,1625 1610,1645 1610,1930 CN4.2
W5500_LINKLED: IC1.25 R23.1 | length 1710.6
  Top Layer w10: R23.1 350,1290 490,1430 v1(820,1430) ; v1(1710,1340) 1710,1420 1758.27,1468.27 IC1.25
  Bottom Layer w10: v1(820,1430) 1310,1430 1400,1340 v1(1710,1340)
W5500_RST: CN4.1 IC1.37 R9.1 | length 1156.3
  Top Layer w10: R9.1 1165,1835 v1(1400,1600) 1400,1510 1441.73,1468.27 IC1.37
  Bottom Layer w10: v1(1400,1600) 1600.79,1600 1640,1639.21 CN4.1
pads on no net: BT1. CN2.5 CN2.6 CN3.1 CN3.2 CN3.4 CN3.6 CN5. CN6. CN6.1 CN6.8 H1. H2. H3. H4. IC1.7 IC1.12 IC1.13 IC1.18 IC1.24 IC1.26 IC1.46 IC1.47 IC2.3 IC2.4

## Polygon pours and split planes (outlines as drawn)
GND on Bottom Layer "GND_L02_P002" (solid, remove dead copper, pour order 2): 50,50 2550,50 2550,100 2650,200 2650,1450 2550,1550 2550,2000 2500,2050 50,2050 50,50
GND on Top Layer "GND_L01_P006" (solid, remove dead copper, pour order 6): 50,50 2550,50 2550,100 2650,200 2650,1450 2550,1550 2550,2000 2500,2050 50,2050 50,50

## Keep-outs
Keep-Out Layer:
  the board outline again, w10

## Silkscreen, mask and mechanical layers (free items; w line width, h text height)
Bottom Overlay:
  lines w10: 2275,650 2275,850 cw(c2225,700) 2375,650 ; 2275,750 2375,750 ; 2250,650 cw(c2250,750) 2250,850 2250,650
  text "W5500 SHIELD" at 2380,480 h100
  text "V1.0" at 2380,310 h100